# Altium PCB STM32F103.PcbDoc (part 1 of 5)
Units mil, origin at the board's own origin, x right, y up, seen from the top; angles counter-clockwise.
Board outline 3951 x 3526 mil, 2 copper layers (Top Layer, Bottom Layer); 148 components, 169 nets, 748 pads, 448 vias.
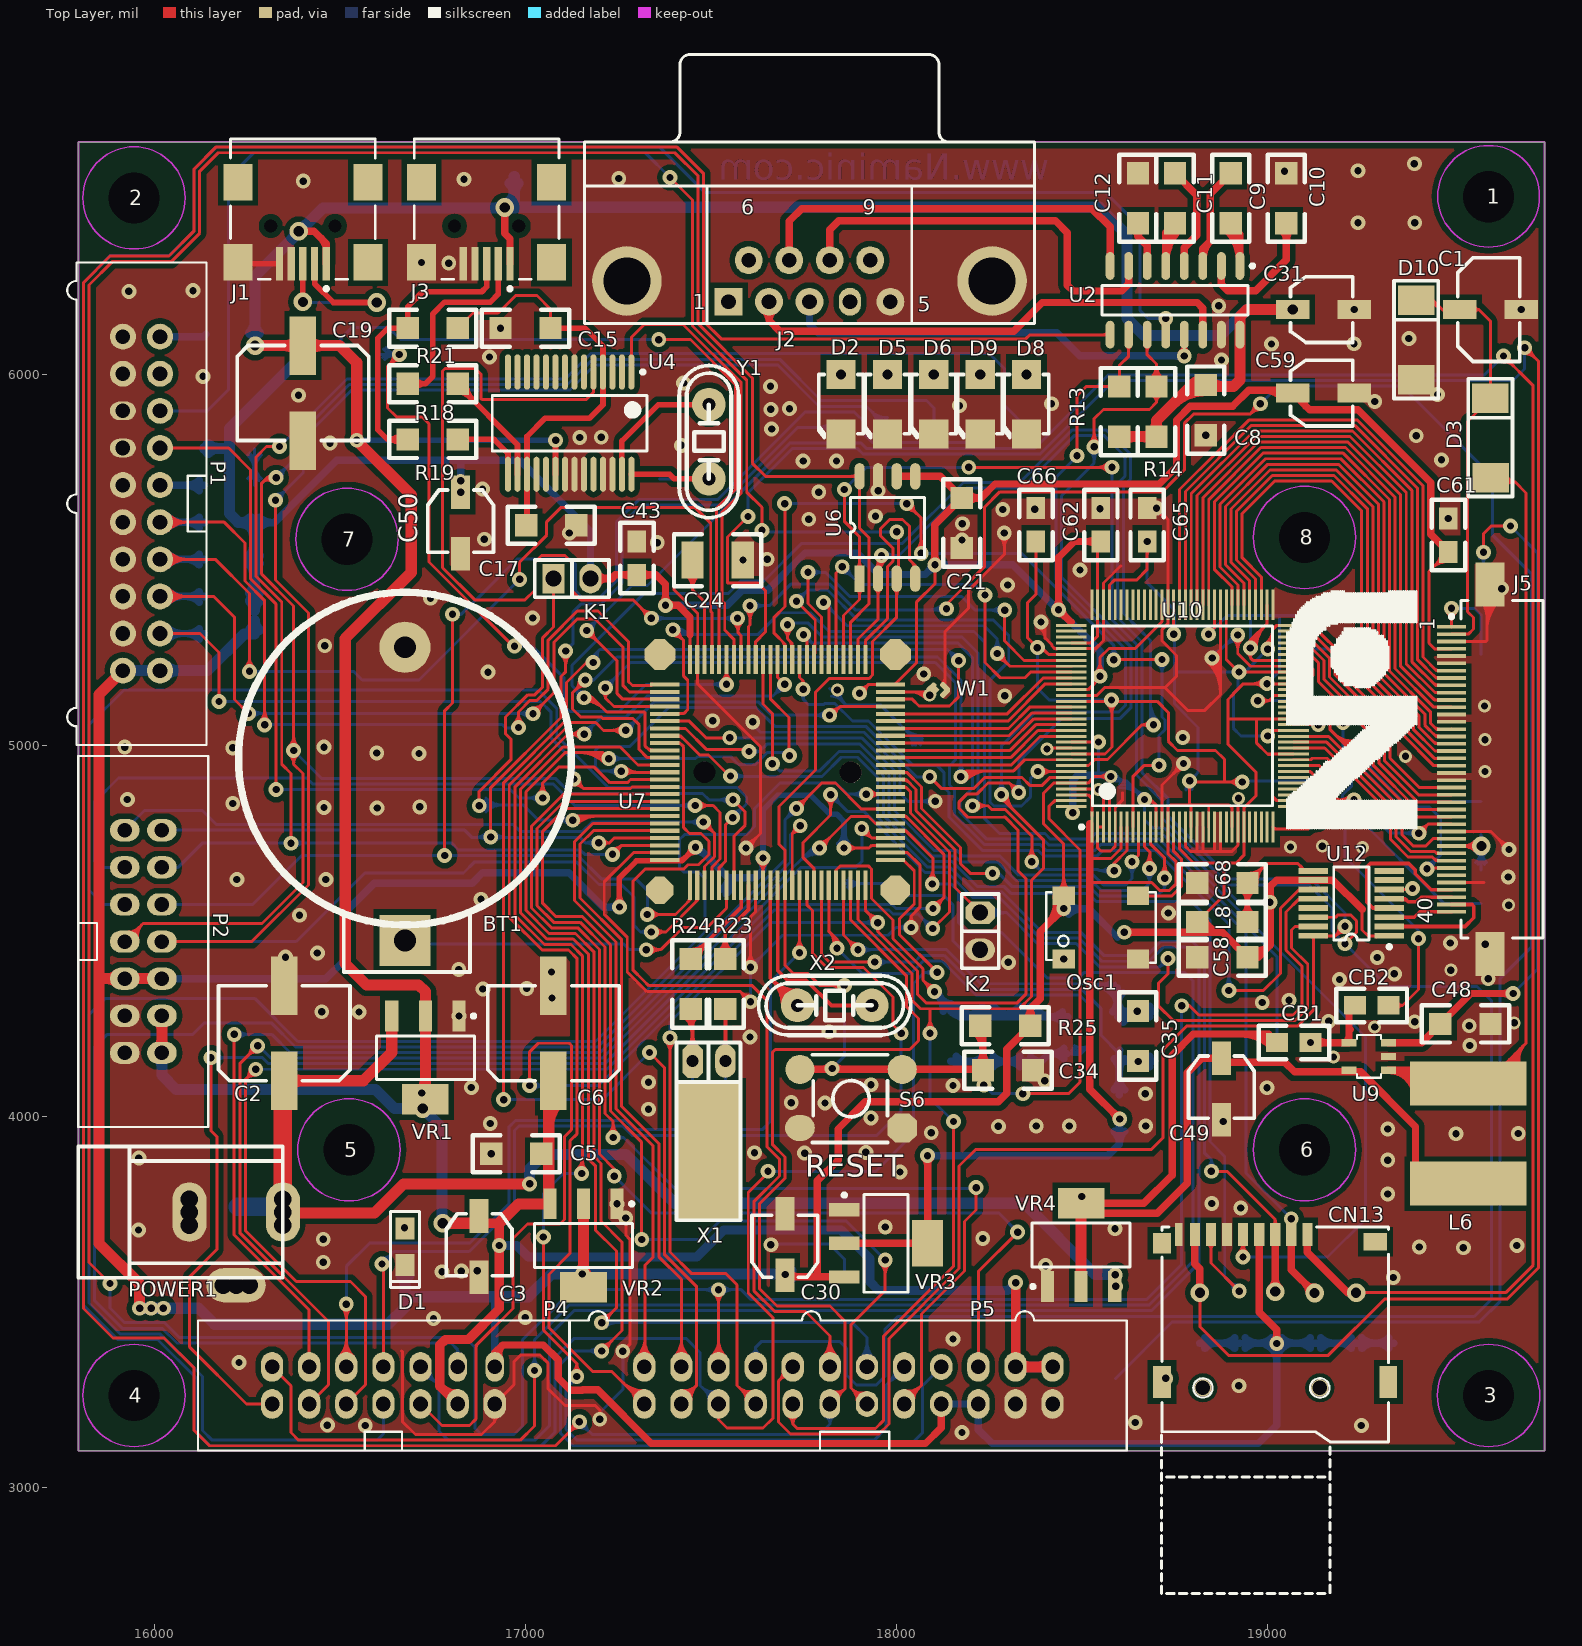
[diagram p0: Top Layer view]
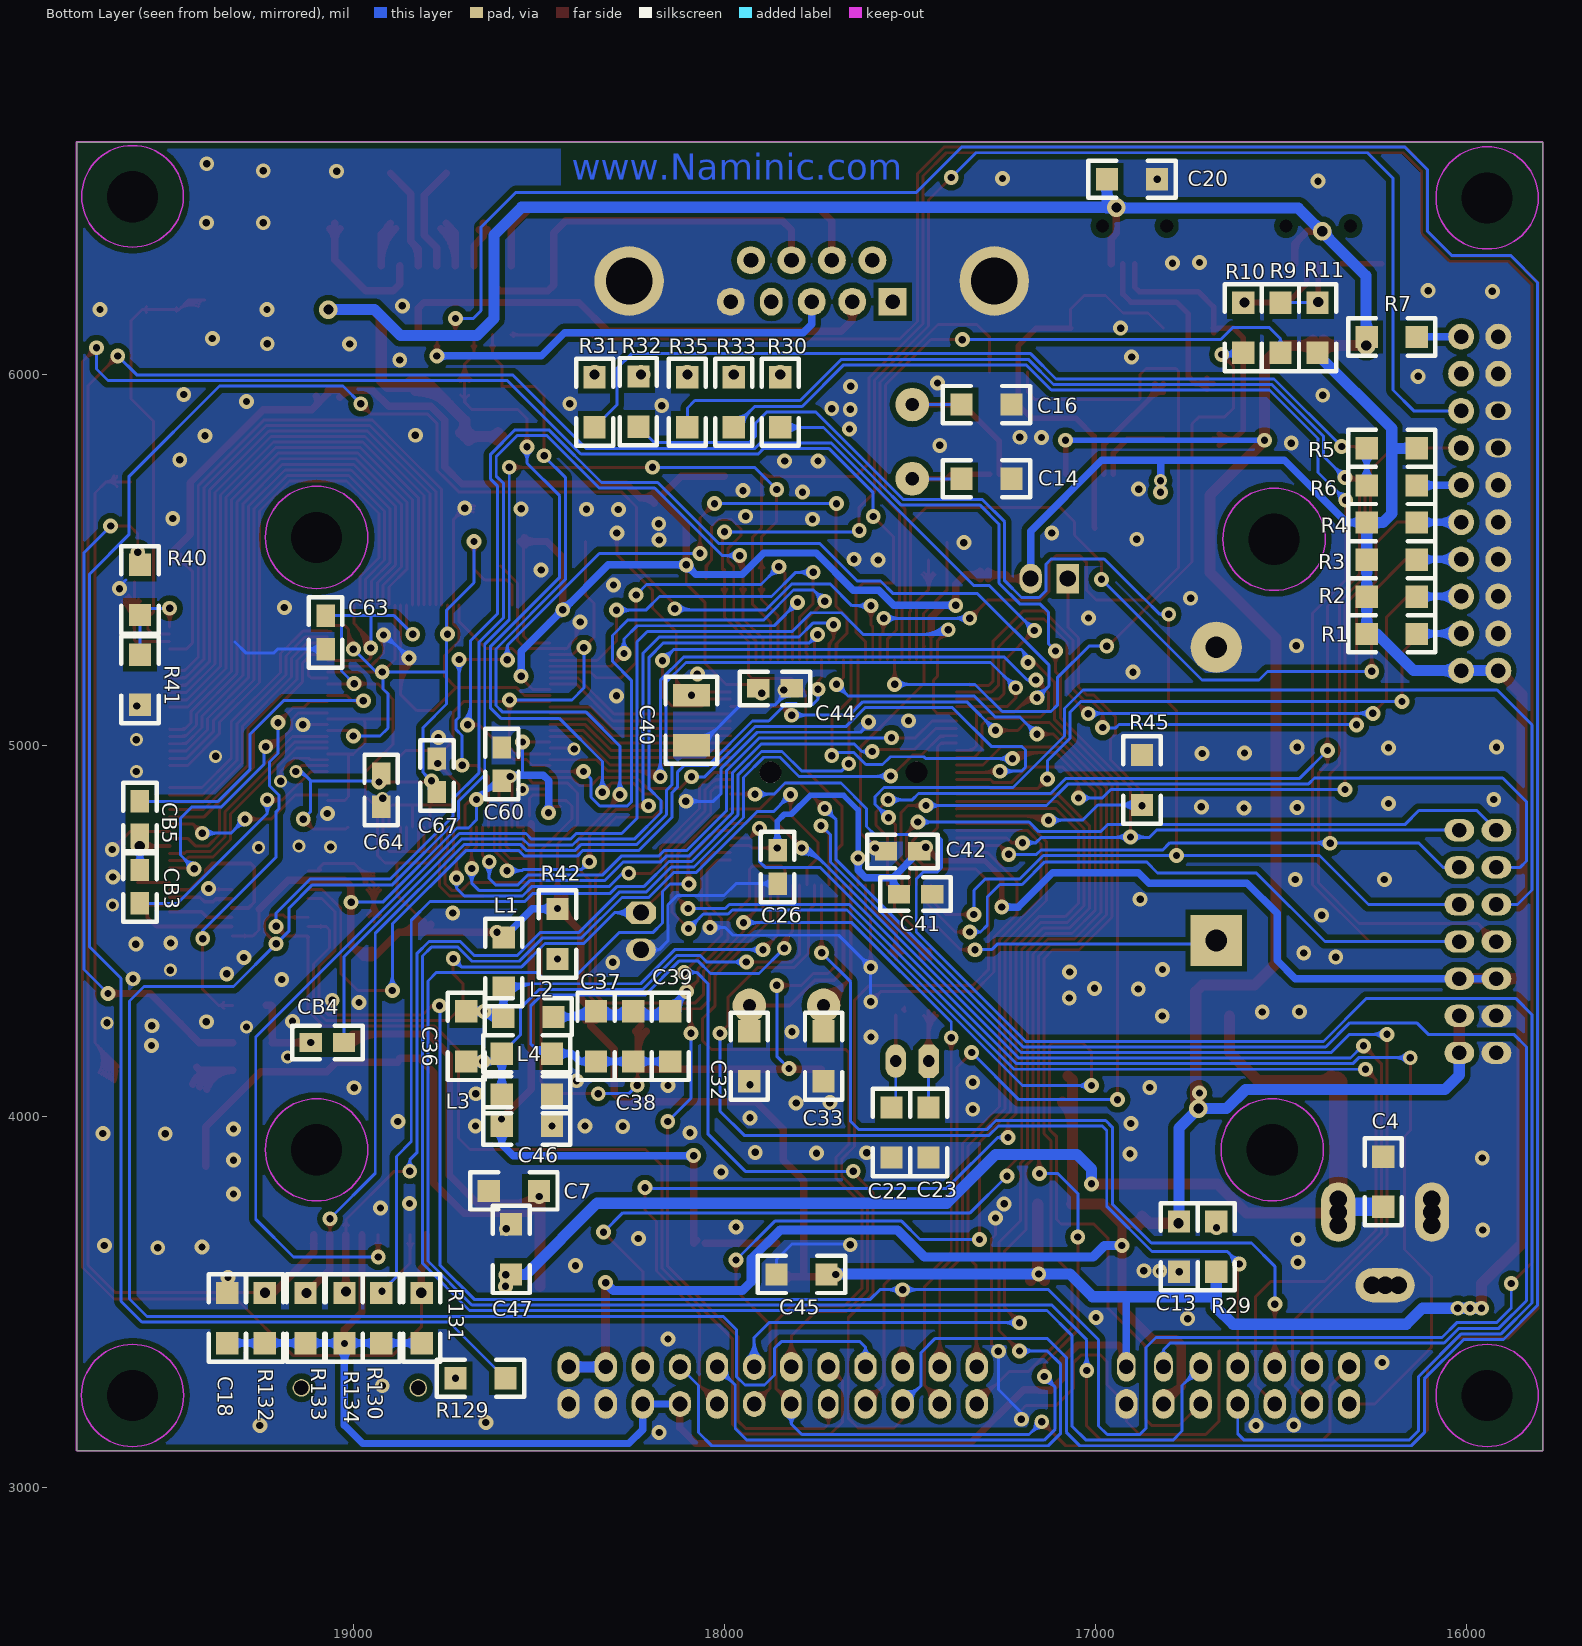
[diagram p1: Bottom Layer view, seen from below]

## Layer stack, top to bottom
Top Layer: signal copper 1.4
Dielectric: dielectric 12.6, FR-4, Dk 4.8
Bottom Layer: signal copper 1.4

## Board outline
15795,3100 15795,6626 19746,6626 19746,3100

## Design rules (kind name [scope] priority, off if disabled: settings)
Clearance Clearance_1 [( INPOLY )] p1: gap=15
Clearance [All] p2: gap=7
ComponentClearance [All] p1 off: gap=10 collisioncheckmode=3 verticalgap=10 showdistances=FALSE
FabricationTestpoint [(IsPad And (OnTopLayer Or OnBottomLayer))] p1: side=3 testpointundercomponent=TRUE minsize=40 maxsize=100 preferedsize=60 minholesize=0 maxholesize=40 preferedholesize=32 testpointgrid=1 allowsidetop=TRUE allowsidebottom=TRUE usegrid=TRUE gridtolerance=0.01
HoleSize [All] p1 off: absolutevalues=TRUE maxlimit=100 minlimit=1 maxpercent=80.000 minpercent=20.000
PolygonConnect [All] p1: connectstyle=Direct reliefconductorwidth=10 reliefentries=4 polygonreliefangle="90 Angle"
RoutingVias [All] p1: holewidth=20 width=40 viastyle="Through Hole" minholewidth=20 minwidth=40 maxholewidth=20 maxwidth=40
SilkscreenOverComponentPads [All] p1: minsilkscreentomaskgap=10
SolderMaskExpansion [All] p1: expansion=4
ViasUnderSMD [All] p1: allowed=TRUE
Width [All] p1: maxlimit=100 minlimit=8 preferedwidth=8
24 further rules are at their usual default settings.

## Classes and differential pairs
net class D[0..15]: D0 D1 D2 D3 D4 D5 D6 D7 D8 D9 D10 D11 D12 D13 D14 D15
component class Designator: D2 D5 D6 D8 D9 R30 R31 R32 R33 R34 R35 S1 S2 S3 S4

## Components (designator, comment, footprint, x,y, rotation, side; value= is the part's Value field where it differs from the comment)
1 "" pad#1 19595,6480 r90 top
2 "" pad#2 15945,6476 r90 top
3 "" pad#2 19595,3249 r90 top
4 "" pad#2 15945,3249 r90 top
5 "PAD" pad#2 16524,3911 r90 top (schematic designator 3)
6 "PAD" pad#2 19099,3911 r90 top (schematic designator 3)
7 "PAD" pad#2 16519,5556 r90 top (schematic designator 3)
8 "" pad#2 19099,5561 r90 top (schematic designator 3)
BT1 "CR1220 holder" BAT 16675,4475 r180 top
C1 "10uF/50V" CAP1050 19600,6175 r180 top
C2 "100uf" CAP470 16350,4225 r270 top (schematic designator C39)
C3 "10uf" CAP1016 16875,3650 r90 top (schematic designator C7)
C4 "100nF" 1206#1 16225,3825 r90 bottom (schematic designator C41)
C5 "100nF" 1206#1 16975,3900 r180 top (schematic designator C42)
C6 "100uf" CAP470 17075,4225 r270 top (schematic designator C35)
C7 "100nF" 1206#2 18500,3800 r0 bottom
C8 "100nF" 1206#1 18833,5904 r90 top
C9 "100nF" 1206#1 18900,6475 r270 top
C10 "100nF" 1206#1 19050,6475 r270 top
C11 "100nF" 1206#1 18750,6475 r90 top
C12 "100nF" 1206#1 18650,6475 r270 top
C13 "100nF" 1206#1 16775,3650 r270 bottom (schematic designator C38)
C14 "10pF" 1206#1 17294,5719 r0 bottom
C15 "100nF" 1206#1 17000,6125 r0 top
C16 "10pF" 1206#1 17294,5919 r0 bottom
C17 "100nF" 1206#1 17069,5594 r180 top
C18 "100nF" 1206#2 19340,3390 r90 bottom
C19 "100uF" CAP470 16400,5950 r90 top
C20 "100nF" 1206#1 16902,6526 r0 bottom
C21 "100nF" 1206#1 18175,5600 r270 top
C22 "10pF" 1206#2 17550,4025 r270 bottom
C23 "10pF" 1206#2 17450,4025 r270 bottom
C24 "2.2uf/10V" 1210 17450,5500 r180 top
C26 "100nF" 0805 17857,4628 r90 bottom
C30 "10uF" CAP1016 17699,3656 r270 top
C31 "10uF" CAP1016 19150,6175 r180 top
C32 "20pF" 1206#1 17933,4163 r270 bottom
C33 "20pF" 1206#1 17733,4163 r270 bottom
C34 "100nF" 1206#1 18300,4125 r180 top
C35 "100nF" 1206#2 18650,4150 r90 top
C36 "1uF" 1206#2 18696,4149 r90 bottom
C37 "1uF" 1206#2 18346,4149 r90 bottom
C38 "100nF" 1206#2 18246,4149 r90 bottom
C39 "20pF" 1206#2 18146,4149 r90 bottom
C40 "2.2uf/10V" 1210 18089,5136 r90 bottom
C41 "100nF" 0805 17440,4600 r0 bottom
C42 "100nF" 0805 17565,4715 r180 bottom
C43 "100nF" 0805 17300,5550 r270 top
C44 "100nF" 0805 17819,5154 r0 bottom
C45 "100nF" 1206#2 17725,3575 r0 bottom
C46 "100nF" 1206#2 18600,3975 r180 bottom
C47 "100nF" 1206#2 18575,3575 r90 bottom
C48 "200pF" 1206#2 19600,4250 r180 top
C49 "10uF" CAP1016 18875,4075 r90 top
C50 "10uf" CAP1016 16825,5600 r90 top
C58 "100nF" 1206#2 18810,4430 r0 top
C59 "10uF" CAP1016 19150,5950 r180 top
C60 "100nF" 0805 18600,4905 r90 bottom
C61 "100nF" 0805 19486.48,5522 r90 top
C62 "100nF" 0805 18550,5550 r90 top
C63 "100nF" 0805 19075,5350 r270 bottom
C64 "10nF" 0805 18925,4925 r270 bottom
C65 "10nF" 0805 18675,5550 r90 top
C66 "10nF" 0805 18375,5550 r90 top
C67 "10nF" 0805 18775,4875 r90 bottom
C68 "100nF" 1206#2 18810,4630 r0 top
CB1 "JUMPER" 0805 19025,4200 r0 top
CB2 "JUMPER" 0805 19325,4300 r180 top
CB3 "JUMPER" 0805 19575,4575 r90 bottom
CB4 "JUMPER" 0805 19025,4200 r0 bottom
CB5 "JUMPER" 0805 19575,4850 r270 bottom
CN13 "PJS008-2000" MicroSD_1 19020,3476 r0 top (schematic designator CN1)
D1 "LED0" LED-0805 16675,3650 r90 top
D2 "LED3" LED-1206 17850,6000 r270 top (schematic designator D3)
D3 "SS14" 1N4007 19600.2,5710.9 r90 top
D5 "LED3" LED-1206 17975,6000 r270 top (schematic designator D2)
D6 "LED3" LED-1206 18100,6000 r270 top (schematic designator D5)
D8 "LED3" LED-1206 18350,6000 r270 top (schematic designator D6)
D9 "LED3" LED-1206 18225,6000 r270 top (schematic designator D4)
D10 "ZENER 28V" 1N4007 19400,5975 r90 top
J1 "1-1470156-2" 440247 16400,6607 r90 top
J2 "D Connector 9" DSUB1.385-2H9 17765,6626 r0 top (schematic designator J3)
J3 "1-1470156-2" 440247 16895,6607 r90 top (schematic designator J2)
J5 "CL586-0527-7" FH40SB 19495,5320 r270 bottom
K1 "Header 2" SIP2#1 17075,5450 r0 top (schematic designator k1)
K2 "Header 2" SIP2#2 18225,4550 r270 top (schematic designator k2)
L1 "10UH" L1206 18590,5058 r270 bottom
L2 "10UH" L1206 19171,4274 r180 bottom
L3 "10UH" L1206 17890,4054 r0 bottom
L4 "10UH" L1206 19175,4175 r180 bottom
L6 "100uH 500mA" Inductorsmd 19600,3700 r90 top
L8 "100mh" L1206 18235,4530 r0 top
Osc1 "OSILATOR" XTAL_5X7 18450,4425 r90 top
P1 "Header 10X2" IDC20S 16015,5202 r180 top
P2 "Header 7X2" IDC14S#1 15920,4772 r0 top (schematic designator P4)
P4 "Header 7X2" IDC14S#2 16317,3226 r90 top (schematic designator P2)
P5 "Header 12X2" IDC24S 17320,3226 r90 top (schematic designator P3)
POWER1 "POWER" "power jack" 16220,3662 r270 top
R1 "10K" 1206#1 16202,5301 r0 bottom
R2 "10K" 1206#1 16202,5401 r0 bottom
R3 "10K" 1206#1 16202,5501 r0 bottom
R4 "10K" 1206#1 16202,5601 r0 bottom
R5 "10K" 1206#1 16202,5801 r180 bottom
R6 "0R" 1206#1 16202,5701 r0 bottom
R7 "0R" 1206#1 16202,6101 r0 bottom
R9 "33R" 1206#1 16502,6126 r90 bottom
R10 "33R" 1206#1 16602,6126 r90 bottom
R11 "1.5K" 1206#1 16402,6126 r90 bottom
R13 "100K" 1206#1 18600,5900 r90 top
R14 "100K" 1206#1 18700,5900 r90 top
R18 "27" 1206#1 16750,5975 r0 top
R19 "27" 1206#1 16750,5825 r180 top
R21 "1.5k" 1206#1 16750,6125 r0 top
R23 "0" R1206 16668,4100 r90 top
R24 "0" R1206 16575,4100 r90 top
R25 "10K" R1206 18550,3375 r180 top (schematic designator R40)
R29 "100" 1206#1 16675,3650 r90 bottom
R30 "180" 1206#1 17850,5925 r90 bottom
R31 "180" 1206#1 18350,5925 r90 bottom
R32 "180" 1206#1 18232,5927 r90 bottom
R33 "180" 1206#1 17975,5925 r90 bottom
R35 "180" 1206#1 18100,5925 r90 bottom
R40 "1K" 1206#2 19575,5487 r270 bottom
R41 "80" 1206#2 19575,5110 r90 bottom
R42 "10K" 1206#2 18450,4425 r90 bottom
R45 "10K" 1206#2 16875,4975 r270 bottom
R129 "0" R1206 18400,2425 r0 bottom
R130 "47K" R1206 19795,3200 r90 bottom
R131 "47K" R1206 19686,3200 r90 bottom
R132 "47K" R1206 20109,3200 r90 bottom
R133 "47K" R1206 19999,3200 r90 bottom
R134 "47K" R1206 19894,3200 r90 bottom
S6 "RESET" SWSMD 17875,4050 r180 top (schematic designator S4)
U2 "MAX232AESE" NSO16_L 18750,6200 r270 top
U4 "PL2303HX" SSOP-SS28_M 17119,5869 r270 top (schematic designator U5)
U6 "AT45DB161B" SOP8 17900,5450 r90 top
U7 "STM32F103VET6" TQ100_TOOL 17443,4624 r0 top (schematic designator U2)
U9 "TPS61040" SOT-23-5L 19325,4125 r270 top
U10 "SSD1963" LQFP128_M 18770,5080 r90 top
U12 "ADS7843E" DBQ016 19225,4575 r90 top
VR1 "ASM1117 5V" AMS117 16727,4106 r0 top
VR2 "ASM1117 3.3V" AMS117 17153,3600 r0 top
VR3 "ASM1117(1.2)" AMS117 18024,3656 r90 top
VR4 "ASM1117(3.3)" AMS117 18500,3707.68 r180 top
W1 "Jumper" JP2_SMD 18112,5150 r180 top
X1 "HC-49S-C16QSA-8M(jfvny)(with socket)" Xtal1 17450,4150 r0 top
X2 "HC-49S-C16QSA-8M(jfvny)(with socket)" XTAL3 17733,4300 r0 top
Y1 "XTAL" XTAL3 17494,5719 r90 top

## Footprints (in the part's own frame and the unit in brackets; to place one, negate y for a bottom-side part, rotate by r counter-clockwise, add the part's x,y. Pads: shape width x height; smd on the part's side, far side on the other; paste and mask are expansions set on the pad)
1N4007 [mm]
  rect 2x2.5 smd: 1(0.277,-0.005) 2(5.718,0.01)
  silkscreen extent -1.01,-1.5 7.05,1.52
0805 [mil]
  rect 60x50 smd: 1(0,0) 2(90,0)
  silkscreen extent -50,-45 140,45, body extent -16,-23 107,25, height 39
1206#1 [mil]
  rect 60x60 smd: 1(-67.5,0) 2(67.5,0)
  silkscreen extent -118,-50 118,50
1206#2 [mil]
  rect 60x60 smd: 1(0,0) 2(135,0)
  silkscreen extent -50,-50 185,50
1210 [mil]
  rect 60x100 smd: 1(0,0) 2(-135,0)
  silkscreen extent -185,-70 50,70
440247 [mm] "Connector; USB2.0, Type B, SM; 5 Position; Right Angle"
  rect 2.3x0.5 smd: 1(-7.85,-1.6) 2(-7.85,-0.8) 3(-7.85,0) 4(-7.85,0.8) 5(-7.85,1.6)
  rect 2.5x2 smd: 6(-7.75,4.45) 7(-2.25,4.45) 8(-7.75,-4.45) 9(-2.25,-4.45)
  round 0.6 hole 0.9 unplated: MH1(-5.25,2.2) MH2(-5.25,-2.2)
  silkscreen extent -9.67,-4.95 0.7,4.95
AMS117 [mm] "Regulator"
  rect 0.9x2.1 smd: 1(2.376,4.196) 3(-2.224,4.196) 4(0.076,4.196)
  rect 3.2x2.1 smd: 4(0.076,-1.504)
  silkscreen extent -3.27,-0.15 3.5,4.32
BAT [mm]
  rect 3.5x3.5 hole 1.5: 1(0,0)
  round 3.5 hole 1.5: 2(0,-20.066)
  silkscreen extent -11.39,-23.83 11.39,2.16
CAP470 [mm]
  rect 4x1.8 smd: 1(3.25,0) 2(-3.25,0)
  silkscreen extent -3.25,-4.5 3.25,4.5, body extent -5.47,-5.08 5.53,5.22, height 7.9
CAP1016 [mm]
  rect 2.3x1.3 smd: 1(2.1,0) 2(-2.1,0)
  silkscreen extent -2,-2.25 2.25,2.25
CAP1050 [mm]
  rect 2.3x1.3 smd: 1(2.1,0) 2(-2.1,0)
  silkscreen extent -2,-3.55 2.25,3.55
DBQ016 [mm] "SSOP; 16 Leads; Body Width 3.9 mm; Pitch 0.635 mm"
  rect 0.4x2 smd: 1(-2.222,-2.6) 2(-1.587,-2.6) 3(-0.952,-2.6) 4(-0.317,-2.6) 5(0.318,-2.6) 6(0.953,-2.6) 7(1.588,-2.6) 8(2.222,-2.6) 9(2.222,2.6) 10(1.587,2.6) 11(0.952,2.6) 12(0.317,2.6) 13(-0.318,2.6) 14(-0.953,2.6) 15(-1.588,2.6) 16(-2.222,2.6)
  silkscreen extent -3.1,-2.73 2.5,1.2
DSUB1.385-2H9 [mm] "Connector; D Subminiature; 9 Position; Right Angle; Pitch 1.385 mm"
  rect 1.905x1.905 hole 1: 1(-5.54,-10.92)
  round 1.905 hole 1: 2(-2.77,-10.92) 3(0,-10.92) 5(5.54,-10.92) 6(-4.155,-8.08) 7(-1.385,-8.08) 8(1.385,-8.08) 9(4.155,-8.08)
  oval 1.524x1.905 hole 1: 4(2.77,-10.92)
  round 4.76 hole 3.2: 10(-12.495,-9.5) 11(12.495,-9.5)
  silkscreen extent -15.4,-12.4 15.4,6
FH40SB [mm] "Connector; FH12 Series; 40 Position; 0.5mm Spaced Bottom Contact"
  rect 0.254x2 smd far side: 1(0,0) 2(0.5,0) 3(1,0) 4(1.5,0) 5(2,0) 6(2.5,0) 7(3,0) 8(3.5,0) 9(4,0) 10(4.5,0) 11(5,0) 12(5.5,0) 13(6,0) 14(6.5,0) 15(7,0) 16(7.5,0) 17(8,0) 18(8.5,0) 19(9,0) 20(9.5,0) 21(10,0) 22(10.5,0) 23(11,0) 24(11.5,0) 25(12,0) 26(12.5,0) 27(13,0) 28(13.5,0) 29(14,0) 30(14.5,0) 31(15,0) 32(15.5,0) 33(16,0) 34(16.5,0) 35(17,0) 36(17.5,0) 37(18,0) 38(18.5,0) 39(19,0) 40(19.5,0)
  rect 3x2 smd far side: 41(-2.9,-2.625) 42(22.4,-2.625)
IDC14S#1 [mil]
  oval 80x60 hole 39.37: 1(0,0) 2(100,0) 3(0,-100) 4(100,-100) 5(0,-200) 6(100,-200) 7(0,-300) 8(100,-300) 9(0,-400) 10(100,-400) 11(0,-500) 12(100,-500) 13(0,-600) 14(100,-600)
  silkscreen extent -125,-800 225,200
IDC14S#2 [mil]
  oval 80x60 hole 39.37: 1(0,0) 2(100,0) 3(0,-100) 4(100,-100) 5(0,-200) 6(100,-200) 7(0,-300) 8(100,-300) 9(0,-400) 10(100,-400) 11(0,-500) 13(0,-600)
  oval 80x50 hole 39.37: 12(100,-500) 14(100,-600)
  silkscreen extent -125,-800 225,200
IDC20S [mil]
  round 70 hole 39.37: 1(0,0) 2(100,0) 3(0,-100) 4(100,-100) 5(0,-200) 6(100,-200) 7(0,-300) 8(100,-300) 9(0,-400) 10(100,-400) 11(0,-500) 12(100,-500) 13(0,-600) 15(0,-700) 17(0,-800) 18(100,-800) 19(0,-900) 20(100,-900)
  oval 70x50 hole 39.37: 14(100,-600) 16(100,-700)
  silkscreen extent -125,-1100 250,200
IDC24S [mil]
  oval 80x60 hole 39.37: 1(0,0) 2(100,0) 3(0,-100) 4(100,-100) 5(0,-200) 6(100,-200) 7(0,-300) 8(100,-300) 10(100,-400) 12(100,-500) 15(0,-700) 16(100,-700) 19(0,-900) 20(100,-900) 21(0,-1000) 22(100,-1000) 23(0,-1100) 24(100,-1100)
  oval 80x55 hole 39.37: 9(0,-400) 11(0,-500)
  oval 70x60 hole 39.37: 13(0,-600) 14(100,-600) 17(0,-800) 18(100,-800)
  silkscreen extent -125,-1300 250,200
Inductorsmd [mil]
  rect 118.11x314.96 smd: 1(120,60) 2(390,60)
  body extent 50,-133 459,265, height 185
JP2_SMD [mil]
  oct 14x30 smd rot 45: 1(-18,-8)
  oct 14x30 smd rot 135: 1(-18,8)
  rect 24x24 smd rot 45: 2(13,0)
  oct 15x30 smd rot 135: 2(18,-7)
  oct 15x30 smd rot 45: 2(18,7)
L1206 [mil]
  rect 60x60 smd: 1(575,-5) 2(710,-5)
  silkscreen extent 525,-55 760,45, body extent 573,-37 707,27, height 67
LED-0805 [mm]
  rect 1.5x1.3 smd: 1(1.25,0) 2(-1.25,0)
  silkscreen extent -2.8,-1 2.4,1
LED-1206 [mm]
  rect 2x2 smd: 1(0,0) 2(4.064,0)
  silkscreen extent 0,-1.52 4.32,1.52
LQFP128_M [mm] "Thin QFP, 128-Leads, Body 14x14mm, Pitch 0.4mm, IPC Low Density"
  rect 2.1x0.203 smd: 1(-7.6,6.2) 2(-7.6,5.8) 3(-7.6,5.4) 4(-7.6,5) 5(-7.6,4.6) 6(-7.6,4.2) 7(-7.6,3.8) 8(-7.6,3.4) 9(-7.6,3) 10(-7.6,2.6) 11(-7.6,2.2) 12(-7.6,1.8) 13(-7.6,1.4) 14(-7.6,1) 15(-7.6,0.6) 16(-7.6,0.2) 17(-7.6,-0.2) 18(-7.6,-0.6) 19(-7.6,-1) 20(-7.6,-1.4) 21(-7.6,-1.8) 22(-7.6,-2.2) 23(-7.6,-2.6) 24(-7.6,-3) 25(-7.6,-3.4) 26(-7.6,-3.8) 27(-7.6,-4.2) 28(-7.6,-4.6) 29(-7.6,-5) 30(-7.6,-5.4) 31(-7.6,-5.8) 32(-7.6,-6.2) 65(7.6,-6.2) 66(7.6,-5.8) 67(7.6,-5.4) 68(7.6,-5) 69(7.6,-4.6) 70(7.6,-4.2) 71(7.6,-3.8) 72(7.6,-3.4) 73(7.6,-3) 74(7.6,-2.6) 75(7.6,-2.2) 76(7.6,-1.8) 77(7.6,-1.4) 78(7.6,-1) 79(7.6,-0.6) 80(7.6,-0.2) 81(7.6,0.2) 82(7.6,0.6) 83(7.6,1) 84(7.6,1.4) 85(7.6,1.8) 86(7.6,2.2) 87(7.6,2.6) 88(7.6,3) 89(7.6,3.4) 90(7.6,3.8) 91(7.6,4.2) 92(7.6,4.6) 93(7.6,5) 94(7.6,5.4) 95(7.6,5.8) 96(7.6,6.2)
  rect 0.203x2.1 smd: 33(-6.2,-7.6) 34(-5.8,-7.6) 35(-5.4,-7.6) 36(-5,-7.6) 37(-4.6,-7.6) 38(-4.2,-7.6) 39(-3.8,-7.6) 40(-3.4,-7.6) 41(-3,-7.6) 42(-2.6,-7.6) 43(-2.2,-7.6) 44(-1.8,-7.6) 45(-1.4,-7.6) 46(-1,-7.6) 47(-0.6,-7.6) 48(-0.2,-7.6) 49(0.2,-7.6) 50(0.6,-7.6) 51(1,-7.6) 52(1.4,-7.6) 53(1.8,-7.6) 54(2.2,-7.6) 55(2.6,-7.6) 56(3,-7.6) 57(3.4,-7.6) 58(3.8,-7.6) 59(4.2,-7.6) 60(4.6,-7.6) 61(5,-7.6) 62(5.4,-7.6) 63(5.8,-7.6) 64(6.2,-7.6) 97(6.2,7.6) 98(5.8,7.6) 99(5.4,7.6) 100(5,7.6) 101(4.6,7.6) 102(4.2,7.6) 103(3.8,7.6) 104(3.4,7.6) 105(3,7.6) 106(2.6,7.6) 107(2.2,7.6) 108(1.8,7.6) 109(1.4,7.6) 110(1,7.6) 111(0.6,7.6) 112(0.2,7.6) 113(-0.2,7.6) 114(-0.6,7.6) 115(-1,7.6) 116(-1.4,7.6) 117(-1.8,7.6) 118(-2.2,7.6) 119(-2.6,7.6) 120(-3,7.6) 121(-3.4,7.6) 122(-3.8,7.6) 123(-4.2,7.6) 124(-4.6,7.6) 125(-5,7.6) 126(-5.4,7.6) 127(-5.8,7.6) 128(-6.2,7.6)
  silkscreen extent -7.72,-6.15 6.15,7.02
MicroSD_1 [mm] "altium designer (M.Hariri)"
  round 1.2 hole 1: 0(-4.95,-5.25) 0(3.05,-5.25)
  rect 0.7x1.6 smd: 1(2.2,5.25) 2(1.1,5.25) 3(0,5.25) 4(-1.1,5.25) 5(-2.2,5.25) 6(-3.3,5.25) 7(-4.4,5.25) 8(-5.5,5.25)
  rect 0.508x1.6 smd: 9(-6.6,5.25)
  rect 1.2x2.2 smd: 10(-7.75,-4.85) sh3(7.75,-4.85)
  rect 1.2x1.4 smd: sh1(-7.75,4.65)
  rect 1.6x1.2 smd: sh4(6.85,4.75)
  silkscreen extent -7.77,-19.32 7.74,5.77
NSO16_L [mm] "SOIC, 16-Leads, Body 9.9x3.9mm, Pitch 1.27mm, IPC High Density"
  oval 1.9x0.6 smd: 1(-2.35,4.445) 2(-2.35,3.175) 3(-2.35,1.905) 4(-2.35,0.635) 5(-2.35,-0.635) 6(-2.35,-1.905) 7(-2.35,-3.175) 8(-2.35,-4.445) 9(2.35,-4.445) 10(2.35,-3.175) 11(2.35,-1.905) 12(2.35,-0.635) 13(2.35,0.635) 14(2.35,1.905) 15(2.35,3.175) 16(2.35,4.445)
  silkscreen extent -2.47,-5 1,5.42, body extent -2,-5 2,5, height 1.75
pad#1 [mm]
  round 2.8 hole 3.5: 1(-0.025,0)
  Keep-Out Layer circle w0.1: c0,0 r3.48
pad#2 [mm]
  round 2.8 hole 3.5: 1(0,0)
  Keep-Out Layer circle w0.1: c0,0 r3.5
"power jack" [mil] "BY:SAFAGHI"
  round 47 hole 47.24: 1(-116,126) 1(-46,126) 2(-116,-126) 2(-46,-126) 2(116,-35) 2(116,35)
  oval 160x92 hole 47.24: 1(-81,126) 2(-81,-126)
  oval 92x160 hole 47.24: 2(116,0)
  silkscreen extent -258,-425 96,126
R1206 [mil]
  rect 60x60 smd: 1(190,-870) 2(325,-870)
  silkscreen extent 140,-920 375,-820, body extent 176,-905 341,-834, height 25
SIP2#1 [mil]
  rect 60x80 hole 43.31: 1(0,0)
  oval 60x80 hole 43.31: 2(100,0)
  silkscreen extent -50,-50 150,50
SIP2#2 [mil]
  oct 60x80 hole 43.31: 1(0,0)
  oval 60x80 hole 43.31: 2(100,0)
  silkscreen extent -50,-50 150,50
SOP8 [mm]
  rect 1.8x0.7 smd: 1(0,0)
  oval 1.8x0.7 smd: 2(0,-1.27) 3(0,-2.54) 4(0,-3.81) 5(7,-3.81) 6(7,-2.54) 7(7,-1.27) 8(7,0)
  silkscreen extent 1.43,-4.44 5.56,0.64
SOT-23-5L [mil]
  rect 20x40 smd: 1(0,0) 2(-37.4,0) 3(-74.8,0) 4(-74.8,-106.3) 5(0,-106.3)
  silkscreen extent -95,-85 20,-20
SSOP-SS28_M [mm] "SOP, 28-Leads, Body 10.2x5.2mm, Pitch 0.65mm, IPC Low Density"
  oval 2.4x0.406 smd: 1(-3.5,4.225) 2(-3.5,3.575) 3(-3.5,2.925) 4(-3.5,2.275) 5(-3.5,1.625) 6(-3.5,0.975) 7(-3.5,0.325) 8(-3.5,-0.325) 9(-3.5,-0.975) 10(-3.5,-1.625) 11(-3.5,-2.275) 12(-3.5,-2.925) 13(-3.5,-3.575) 14(-3.5,-4.225) 15(3.5,-4.225) 16(3.5,-3.575) 17(3.5,-2.925) 18(3.5,-2.275) 19(3.5,-1.625) 20(3.5,-0.975) 21(3.5,-0.325) 22(3.5,0.325) 23(3.5,0.975) 24(3.5,1.625) 25(3.5,2.275) 26(3.5,2.925) 27(3.5,3.575) 28(3.5,4.225)
  silkscreen extent -3.62,-5.3 1.9,5.3, body extent -2.7,-5.3 2.7,5.3, height 2
SWSMD [mil]
  oct 78.74x78.74 smd: 1(-140,80)
  oval 80x70 smd: 1(135.59,80)
  round 78.74 smd: 2(-140,-77.48) 2(135.59,-77.48)
  silkscreen extent -100,-117 102,119
TQ100_TOOL [mm]
  oct 1.778x1.778 smd rot 135: 0(-2.06,-0.335)
  oct 2x2 smd rot 45: 0(-2.06,15.785)
  oval 0.279x1.5 hole 1.5 unplated: 0(1,7.725)
  round 1.473 hole 1.5 unplated: 0(11,7.725)
  oct 1.905x1.905 smd rot 45: 0(14.06,-0.335)
  oct 2x2 smd rot 135: 0(14.06,15.785)
  rect 0.279x2 smd: 1(0,0) 2(0.5,0) 3(1,0) 4(1.5,0) 5(2,0) 6(2.5,0) 7(3,0) 8(3.5,0) 9(4,0) 10(4.5,0) 11(5,0) 12(5.5,0) 13(6,0) 14(6.5,0) 15(7,0) 16(7.5,0) 17(8,0) 18(8.5,0) 19(9,0) 20(9.5,0) 21(10,0) 22(10.5,0) 23(11,0) 24(11.5,0) 25(12,0) 51(12,15.45) 52(11.5,15.45) 53(11,15.45) 54(10.5,15.45) 55(10,15.45) 56(9.5,15.45) 57(9,15.45) 58(8.5,15.45) 59(8,15.45) 60(7.5,15.45) 61(7,15.45) 62(6.5,15.45) 63(6,15.45) 64(5.5,15.45) 65(5,15.45) 66(4.5,15.45) 67(4,15.45) 68(3.5,15.45) 69(3,15.45) 70(2.5,15.45) 71(2,15.45) 72(1.5,15.45) 73(1,15.45) 74(0.5,15.45) 75(0,15.45)
  rect 2x0.279 smd: 26(13.725,1.725) 27(13.725,2.225) 28(13.725,2.725) 29(13.725,3.225) 30(13.725,3.725) 31(13.725,4.225) 32(13.725,4.725) 33(13.725,5.225) 34(13.725,5.725) 35(13.725,6.225) 36(13.725,6.725) 37(13.725,7.225) 38(13.725,7.725) 39(13.725,8.225) 40(13.725,8.725) 41(13.725,9.225) 42(13.725,9.725) 43(13.725,10.225) 44(13.725,10.725) 45(13.725,11.225) 46(13.725,11.725) 47(13.725,12.225) 48(13.725,12.725) 49(13.725,13.225) 50(13.725,13.725) 76(-1.725,13.725) 77(-1.725,13.225) 78(-1.725,12.725) 79(-1.725,12.225) 80(-1.725,11.725) 81(-1.725,11.225) 82(-1.725,10.725) 83(-1.725,10.225) 84(-1.725,9.725) 85(-1.725,9.225) 86(-1.725,8.725) 87(-1.725,8.225) 88(-1.725,7.725) 89(-1.725,7.225) 90(-1.725,6.725) 91(-1.725,6.225) 92(-1.725,5.725) 93(-1.725,5.225) 94(-1.725,4.725) 95(-1.725,4.225) 96(-1.725,3.725) 97(-1.725,3.225) 98(-1.725,2.725) 99(-1.725,2.225) 100(-1.725,1.725)
Xtal1 [mil]
  oct 55x90 hole 31.5: 1(0,0)
  oval 55x90 hole 31.5: 2(88.5,0)
  rect 173.23x366.14 smd: gnd(43.3,-242.9)
  silkscreen extent -43,-429 129,50
XTAL3 [mm]
  round 2.3 hole 0.9: 1(0,0) 2(5.08,0)
  silkscreen extent -2.67,-2.03 7.75,2.03
XTAL_5X7 [mil]
  rect 50x60 smd: 1(0,0) 2(0,-200) 3(170,-200) 4(170,0)
  silkscreen extent -10,-248 180,47

## Part data
1 2 3 4 8: library part PAD
BT1: library part Battery, "Multicell Battery"
C1 C2 C3 C6 C19 C30 C31 C40 C49 C50 C59: library part "Cap Pol1", "Polarized Capacitor (Radial)"
C4 C5 C13 C18 C48: library part "Cap Semi", "Capacitor (Semiconductor SIM Model)"
C7 C8 C9 C10 C11 C12 C14 C15 C16 C17 C20 C21 C45 C46 C47 C58 C60 C61 C62 C63 C64 C65 C66 C67 C68: library part Cap, "Capacitor"
C22 C23 C26 C32 C33 C34 C35 C36 C37 C38 C39 C41 C42 C43 C44: library part CAP, "Capacitor"
C24: library part ELECTRO2, "Electrolytic Capacitor"
CB1 CB2 CB3 CB4 CB5: library part "Circuit Breaker", "Circuit Breaker"
CN13: library part SMS016AFA5E
D1: "Typical INFRARED GaAs LED"
D2 D5 D6 D8 D9: "Typical BLUE SiC LED"
D3 D10: library part "D Schottky", "Schottky Diode"
J1 J3: "USB 1.1, Right Angle, Thru-Hole, B Type, Receptacle, 4 Position, Black"
J2: "Receptacle Assembly, 9 Position, Right Angle"
J5: "FH12 Series, \"Flip-Lock\" SMT/ZIF FFC/FPC Connector - 0.5mm Spaced Bottom Contact"
K1 K2: "Header, 2-Pin"
L1 L2 L3 L4 L6 L8: library part Inductor, "Inductor"
P1: "Header, 10-Pin, Dual row"
P2 P4: "Header, 7-Pin, Dual row"
P5: "Header, 12-Pin, Dual row"
POWER1: library part "Header 2H", "Header, 2-Pin, Right Angle"
R1 R2 R25 R45: library part res1, "Resistor"
R3 R4 R5 R6 R7 R9 R10 R11 R13 R14 R18 R19 R21 R23 R24 R40 R41 R129 R130 R131 R132 R133 R134: library part Res1, "Resistor"
R29 R42: library part Res3, "Resistor"
R30 R31 R32 R33 R35: library part "Res Semi", "Semiconductor Resistor"
S6: library part SW-PB, "Switch"
U2: "+5V-Powered, Multichannel RS-232 Driver/Receiver"
U4: library part PL2303
U7: library part AT91SAM7XC256-AU, "Smart ARM Microcontroller, ARM7TDMI 32-Bit RISC CPU, 256KB Flash and 64KB SRAM, 100-Pin LQFP, Industrial, Pb-Free"
U9: "Backlight Regulagtor"
U12: "4-Wire Touch Screen Controller, 16-Pin SSOP, Pb-Free"
VR1 VR2 VR3 VR4: library part "Volt Reg_1", "Voltage Regulator"
W1: "Jumper Wire"
X1 X2: library part CRYSTAL, "Crystal"
Y1: "Crystal Oscillator"

## Via types
v1: diameter 40, hole 19.68, Top Layer to Bottom Layer, 402 vias
v2: diameter 35, hole 19.68, Top Layer to Bottom Layer, 21 vias
v3: diameter 50, hole 27.56, Top Layer to Bottom Layer, 19 vias
v4: diameter 40, hole 20, Top Layer to Bottom Layer, 6 vias

## Nets (pads, with @x,y where several pads share a name; then routed paths per layer and width w, separated by ;. In a path a pad name is that pad's centre, name@x,y a point inside that pad or via, vN(x,y) a via of type N, cw(c..) or ccw(c..) an arc to the next point about the centre after c; other vN are vias at no path point)
"10 MHZ": Osc1.3 U10.15 | length 297.1
  Top Layer w8: Osc1.3@18650,4595 18741.21,4595 18768,4621.79 18768,4693.45 18746.38,4715.08 U10.15@18746.38,4780.79
+1.2: C46.1 C64.1 C65.1 C66.1 C67.1 U10.1 U10.6 U10.14 U10.18 U10.21 U10.25 U10.32 U10.40 U10.46 U10.56 U10.64 U10.73 U10.82 U10.93 U10.102 U10.110 U10.119 U10.126 VR3.4 | length 8380
  Top Layer w8: v1@18375,5280 18409.65,5245.35 U10.102@18470.79,5245.35 ; C66.1@18375,5550 18375,5407 18352,5384 18352,5291 v1(18379,5264) ; v1@18380.93,5256.24 cw(c18387.2,5230.94) 18405.63,5249.37 ; v1@18395,5264 ccw(c18404.66,5264) 18397.83,5257.17 ; U10.126@18470.79,4867.4 18515.93,4867.4 18525.91,4857.43 U10.1@18525.91,4810 ; U10.119@18470.79,4977.64 18561.64,4977.64 18580,4996 v1@18580,5119.37 ; U10.110@18470.79,5119.37 v1@18580,5119.37 ; U10.126@18508.13,4867.4 cw(c18510.08,4853.74) 18519.84,4863.5 ; 18520.65,4696 18577.79,4696 18604.65,4722.86 U10.6@18604.65,4780.79 ; 18521.65,4631 18687,4631 18708,4610 18735,4610 18753,4628 18753,4687.24 18730.63,4709.61 U10.14@18730.63,4780.79 18730.63,4833 18737.63,4840 18793.62,4840 ; v1@18567.69,5111.69 cw(c18537.96,5081.96) 18580,5081.96 ; U10.93@18573.15,5379.21 18573.15,5433 18586,5445.85 18645.85,5445.85 18675,5475 v1(18675,5550) ; v1@18573.34,5117.34 cw(c18557.27,5101.27) 18580,5101.27 ; 18580,5086.79 cw(c18615.21,5086.79) v1@18590.31,5111.69 ; C65.1@18663.69,5538.69 cw(c18636.37,5511.37) 18675,5511.37 cw(c18713.63,5511.37) C65.1@18686.31,5538.69 ; v1(18746.38,5300.38) U10.82@18746.38,5379.21 ; v1(18789.38,4905) v1@18789.38,4902 ; U10.18@18793.62,4780.79 18793.62,4840 ; 18840.87,4832 U10.21@18840.87,4780.79 18840.87,4838.13 18839,4840 ; U10.73@18888.11,5379.21 18888,5379.1 18888,5341 18888,5232 v1@18921.89,5198.11 ; U10.25@18903.86,4780.79 18903.86,4832 18895.86,4840 18839,4840 ; v1@18919.69,4890.69 ccw(c18892.37,4863.37) 18892.37,4902 ccw(c18892.37,4940.63) v1@18919.69,4913.31 ; v1(18922.31,5198.11) U10.56@19069.21,5198.11 ; v1(18931,4902) 18882,4902 ; v1@18991.41,5273.5 ccw(c18966.02,5313.44) 19013.35,5313.44 ; v1@18995.71,5266.75 ccw(c18975.28,5298.87) 19013.35,5298.87 ; v1(19000,5026) 19014.63,5040.63 U10.46@19069.21,5040.63 ; 19013.35,5284.3 cw(c18984.55,5284.3) v1(19000,5260) 19013.35,5273.35 19013.35,5313.44 ; 19020.06,5320.16 cw(c19029.9,5310.32) U10.64@19031.87,5324.09 ; 19028.07,4775 cw(c19028.07,4794.76) U10.32@19014.09,4780.79 19019.88,4775 19108,4775 ; U10.40@19069.21,4946.14 19124,4946.14 ; U10.64@19069.21,5324.09 19024,5324.09 19013.35,5313.44 ; v1@19119,4801.87 cw(c19081.44,4801.56) 19108,4775 ; v1@19134.87,4786 ccw(c19134.56,4748.44) 19108,4775 ; v1(19135,4802) 19108,4775 ; 19135,4946.14 19124,4946.14 ; v2(19155,4930) 19138.86,4946.14 19124,4946.14 ; v1@18580,5119.37 18702,5119.37 18732,5089.37 18732,5012 18757,4987 18859,4987 18883,4963 18883,4903 18882,4902 ; v1@18789.38,4902 18882,4902 ; v1@18789.38,4902 18789.38,4844.24 18793.62,4840 ; 18793.62,4840 18839,4840 ; VR3.4@17858.8,3659 17882,3659 VR3.4@17858.8,3659
  Top Layer w20: VR3.4@17858.8,3659 VR3.4@18052,3659 ; VR3.4@17887.87,3653.54 cw(c17901.05,3640.37) 17901.05,3659 cw(c17901.05,3677.63) VR3.4@17887.87,3664.46 ; VR3.4@18075.2,3667 VR3.4@18083.2,3659 v1(18083.2,3895.2) ; v1@18076.13,3888.13 cw(c18059.06,3871.06) 18083.2,3871.06 cw(c18107.35,3871.06) v1@18090.28,3888.13 ; 18520.65,4789.35 18520.65,4696 18520.65,4074.35 v1(18601,3994) ; v1@18591,3994 ccw(c18566.86,3994) 18583.93,4011.07 ccw(c18601,4028.14) v1@18601,4004
  Bottom Layer w8: v1(18379,5264) 18379,5155 18411,5123 v1(18579,5123) ; v1(18675,5550) 18675,5439 18749,5365 18749,5199 ; C67.1@18775,4901 ccw(c18775,4926.05) v1@18792.72,4908.34 ; C67.1@18779.97,4880.52 cw(c18808.62,4883.51) C67.1@18788.25,4903.88 ; C67.1@18787.93,4881.35 cw(c18830.12,4885.75) v1@18800.13,4915.75 ; v1(18789.38,4905) 18812,4927.62 ; C67.1@18795.89,4882.18 cw(c18851.62,4887.99) 18812,4927.62 ; v1(18922.31,5198.11) v1@18920,5198.11 ; v1@18922.31,5199 18939,5199 v1(19000,5260) ; C64.1@18945,4905 19116,4905 ; v1(19000,5026) 18928,5026 18907,5047 18907,5139.84 18920,5152.84 v1@18920,5198.11 ; 19120.58,4911.58 cw(c19152,4880.15) v2@19154.67,4924.51 ; 19133.15,4924.15 cw(c19153.43,4903.87) v2@19155.15,4932.5 ; v1(19135,4802) 19116,4821 19116,4905 ; v2@19144,4935 19116,4907 19116,4905 ; 18749,5199 18749,5112 18812,5049 18812,4927.62 ; 18749,5199 18749.89,5198.11 v1@18920,5198.11
  Bottom Layer w20: v1(18083.2,3895.2) 18083.41,3895 18569,3895 18600,3926 C46.1@18600,3975 18601,3976 v1(18601,3994) ; v1@18090.28,3888.13 cw(c18106.85,3871.55) 18106.85,3895 ; v1@18090.28,3902.28 ccw(c18107.84,3919.84) 18107.84,3895 ; C46.1@18585.86,3960.86 cw(c18551.72,3926.72) 18600,3926.72 cw(c18648.28,3926.72) C46.1@18614.14,3960.86 ; C46.1@18593.93,3986.93 cw(c18579.27,3972.27) C46.1@18600,3972.27 ; C46.1@18600,3967.44 cw(c18627.56,3967.44) C46.1@18608.07,3986.93